# Altium PCB 6C-2L-1550um.PcbDoc
Units mm, origin at the board's own origin, x right, y up, seen from the top; angles counter-clockwise.
Board outline 14 x 14.5 mm, 2 copper layers (Top Layer, Bottom Layer), stack 1.586 mm thick; 18 components, 12 nets, 67 pads, 19 vias.
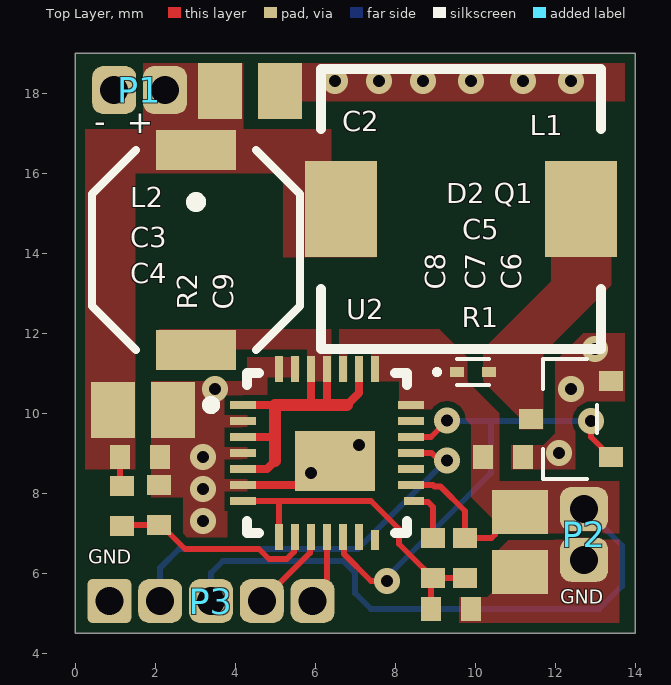
[diagram p0: Top Layer view]
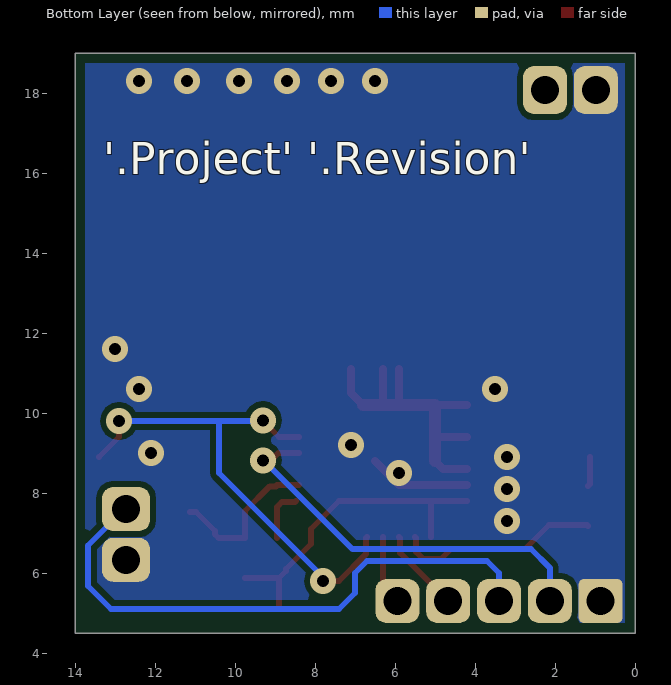
[diagram p1: Bottom Layer view, seen from below]
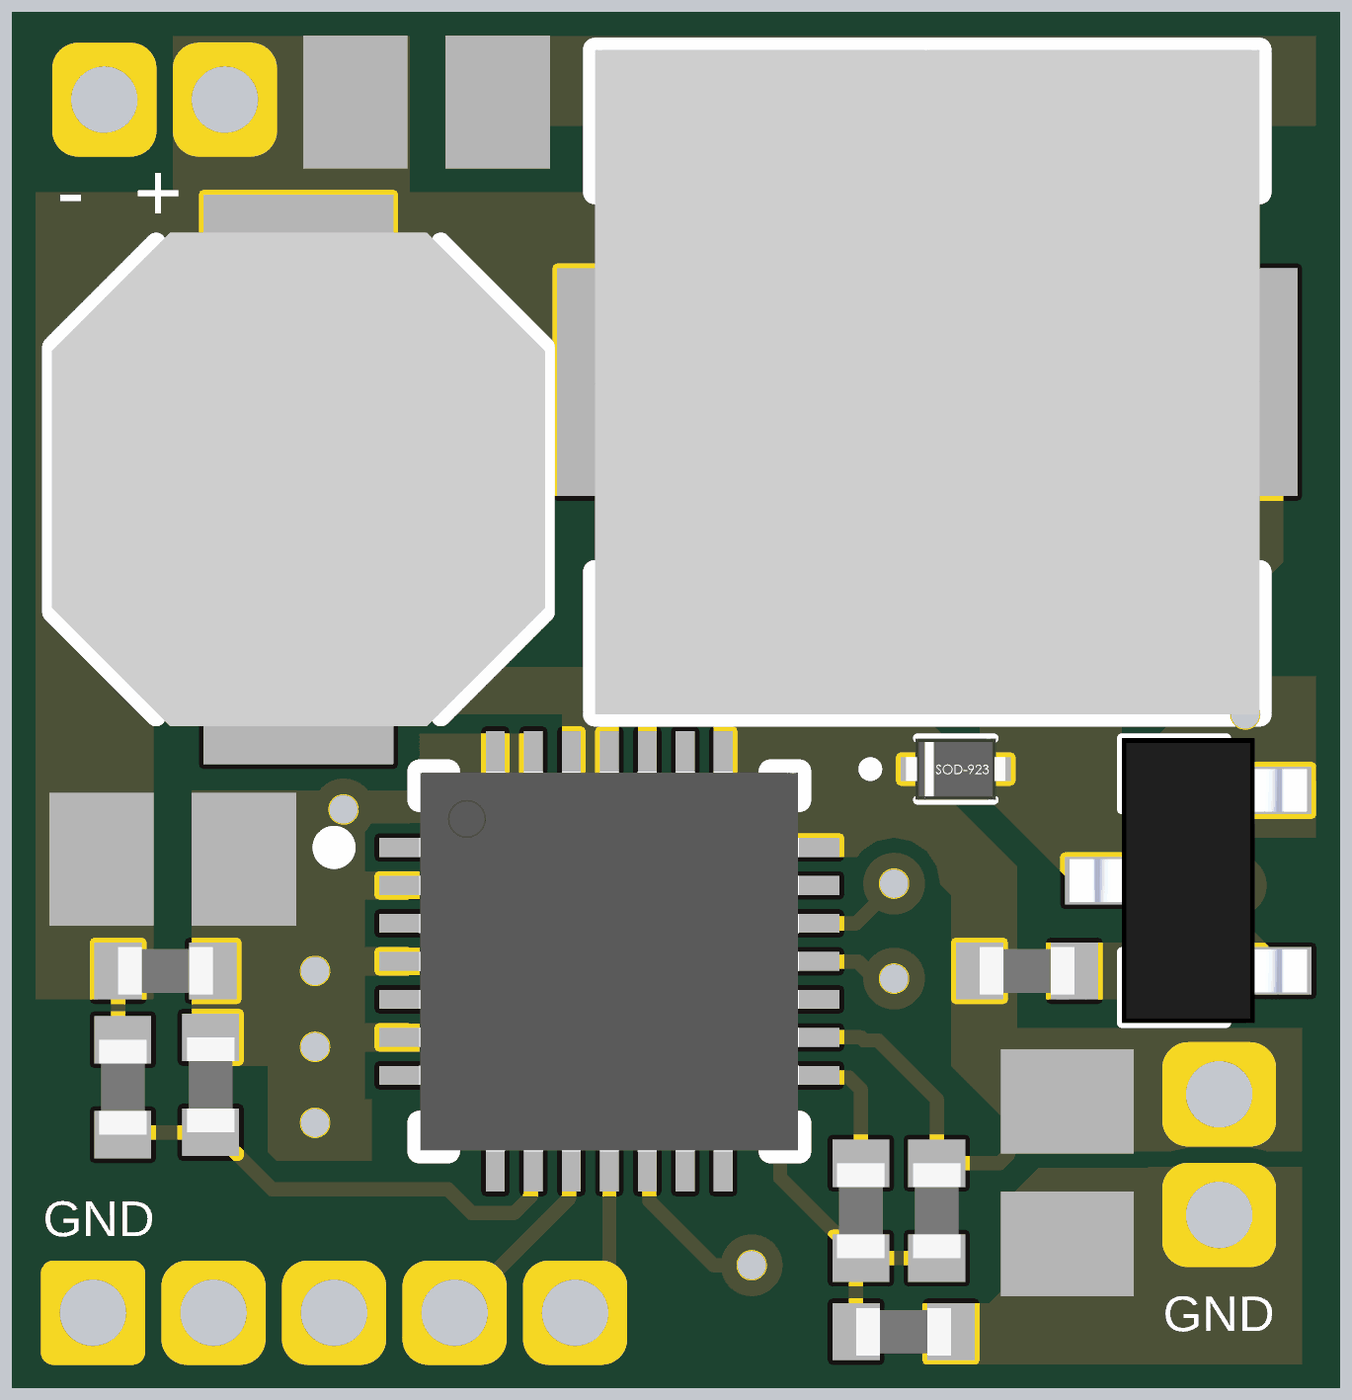
[diagram p2: 3D render of the assembled board from above, using the file's embedded part models]

## Layer stack, top to bottom
Top Solder: solder mask 0.0102, Solder Resist, Dk 3.5
Top Layer: signal copper 0.018
Dielectric1: core 1.55, FR-4, Dk 4.8
Bottom Layer: signal copper 0.018
Bottom Solder: solder mask 0.0102, Solder Resist, Dk 3.5

## Board outline
0,4.5 14,4.5 14,19 0,19

## Design rules (kind name [scope] priority, off if disabled: settings)
BoardOutlineClearance [All] p1: gap=0.25 ignorepadtopadclearanceinfootprint=FALSE except(0: Arc-SplitContinuation Track-SplitContinuation SMDPad-SplitContinuation THPad-SplitContinuation Via-SplitContinuation Fill-SplitContinuation Poly-SplitContinuation Region-SplitContinuation Text-SplitContinuation)
Clearance Clearance-xPP-xTP-xTT [All] p1: gap=0.15 ignorepadtopadclearanceinfootprint=FALSE except(0: Arc-Hole Track-Hole SMDPad-Hole THPad-Hole Via-Hole Fill-Hole Poly-Hole Region-Hole Text-Hole)
ComponentClearance [All] p1: gap=0.25 collisioncheckmode=3 verticalgap=0.25 showdistances=FALSE
DiffPairsRouting [All] p1: maxlimit=0.25 minlimit=0.25 mostfreqgap=0.25 toplayer_minwidth=0.381 toplayer_maxwidth=0.381 toplayer_prefwidth=0.381 bottomlayer_minwidth=0.381 bottomlayer_maxwidth=0.381 bottomlayer_prefwidth=0.381 maxuncoupledlength=12.5
Height [All] p1: minheight=0 maxheight=25 prefheight=12.5
HoleSize HoleSize-PTH [All] p1: absolutevalues=TRUE maxlimit=2 minlimit=0.25 maxpercent=80.000 minpercent=20.000
HoleToHoleClearance [All] p1: gap=0.35 allowstackedmicrovias=TRUE
MinimumAnnularRing "Minimum IAR  >0.45mm" [((ObjectKind = 'Pad') OR (ObjectKind = 'Via')) And (Layer = 'MultiLayer') And (HoleDiameter > AsMM(0.45))] p1: minimumring=0.175 // minimum inner annular ring for pads > 0.45mm finished hole size
MinimumAnnularRing "Minimum IAR <=0.45mm" [((ObjectKind = 'Pad') OR (ObjectKind = 'Via')) And (Layer = 'MultiLayer') And (HoleDiameter <= AsMM(0.45))] p2: minimumring=0.175 // minimum inner annular ring for pads <= 0.45mm finished hole size
MinimumSolderMaskSliver [All] p1: minsoldermaskwidth=0.08
PlaneClearance PlaneClearance-IPI [All] p1: clearance=0.25
PlaneConnect [All] p1: planeconnectstyle=Relief reliefexpansion=0.175 reliefentries=4 reliefconductorwidth=0.2 reliefairgap=0.2
PolygonConnect PolygonConnect-xTW [All] p1: connectstyle=Direct reliefconductorwidth=0.2 reliefentries=4 polygonreliefangle="90 Angle" airgapwidth=0.2
RoutingCorners [All] p1: cornerstyle=45-Degree minsetback=2.5 maxsetback=2.5
RoutingVias "RoutingVias <= 0.45mm" [(ObjectKind = 'Via') And (HoleDiameter <= AsMM(0.45))] p1: holewidth=0.3 width=0.65 viastyle="Through Hole" minholewidth=0.25 minwidth=0.6 maxholewidth=0.45 maxwidth=0.8 // finishet hole size <= 0.45mm
RoutingVias "RoutingVias > 0.45mm" [(ObjectKind = 'Via') And (HoleDiameter > AsMM(0.45))] p2: holewidth=0.5 width=0.85 viastyle="Through Hole" minholewidth=0.5 minwidth=0.85 maxholewidth=0.9 maxwidth=1.25 // finishet hole size > 0.45mm
SilkToSilkClearance [All] p1: silktosilkclearance=0.2
SilkToSolderMaskClearance SilkscreenOverComponentPads [IsPad] p1: minsilkscreentomaskgap=0.2 clearancetoexposedcopper=TRUE
SolderMaskExpansion [All] p1: expansion=0 istentingtop=FALSE
UnRoutedNet [All] p1: checkbadconnections=TRUE
Width Width-xTW [All] p1: maxlimit=1.5 minlimit=0.15 preferedwidth=0.2
18 further rules are at their usual default settings.

## Components (designator, comment, footprint, x,y, rotation, side; value= is the part's Value field where it differs from the comment)
C2 "Cap_0805" 0805 4.375,18.05 r180 top value=22uF
C3 "Cap_0805" 0805 1.7,10.075 r180 top value=22uF
C4 "Cap_0402" 0402 1.625,8.9 r180 top value=100nF
C5 "Cap_0402" 0402 10.7,8.9 r180 top value=100nF
C6 "Cap_0805" 0805 11.125,6.775 r90 top value=22uF
C7 "Cap_0402" 0402 9.75,6.375 r90 top value=100nF
C8 "Cap_0402" 0402 8.95,6.375 r90 top value=470nF
C9 "Cap_0402" 0402 2.1,7.7 r270 top value=100nF
D2 "NSR0140P2" SOD-923 9.55,11.025 r0 top
L1 "SRR7045-102M" SRR7045-102M 6.65,15.1 r0 top value=X
L2 "SD53-4R7-R" SD53-4R7-R 3.025,14.075 r270 top value=X
P1 "1x2 Header" "1x2 Header 1.27" 0.98,18.075 r0 top
P2 "1x2 Header" "1x2 Header 1.27" 12.725,7.6 r270 top
P3 "1x5 Header" "1x5 Header 1.27" 0.86,5.3 r0 top
Q1 "PMV130ENE" SOT-23 13.4,8.9 r90 top
R1 "Res_0402" 0402 9.4,5.1 r0 top value=0
R2 "Res_0402" 0402 1.175,7.675 r270 top value=51K
U2 "Sunboost 3" 28-QFN_0.4mm 4.2,10.2 r0 top

## Footprints (in the part's own frame and the unit in brackets; to place one, negate y for a bottom-side part, rotate by r counter-clockwise, add the part's x,y. Pads: shape width x height; smd on the part's side, far side on the other; paste and mask are expansions set on the pad)
"1x2 Header 1.27" [mm]
  rrect50% 1.1x1.2 hole 0.7 paste+0 mask+0: 1(0,0) 2(1.27,0)
"1x5 Header 1.27" [mm]
  rrect25% 1.1x1.1 hole 0.7 paste+0 mask+0: 1(0,0)
  rrect50% 1.1x1.1 hole 0.7 paste+0 mask+0: 2(1.27,0) 3(2.54,0) 4(3.81,0) 5(5.08,0)
28-QFN_0.4mm [mm]
  rect 0.65x0.2 smd mask+0.05: 1(0,0) 2(0,-0.4) 3(0,-0.8) 4(0,-1.2) 5(0,-1.6) 6(0,-2) 7(0,-2.4) 16(4.2,-2) 17(4.2,-1.6) 18(4.2,-1.2) 19(4.2,-0.8) 20(4.2,-0.4) 21(4.2,0)
  rect 0.2x0.65 smd mask+0.05: 8(0.9,-3.3) 9(1.3,-3.3) 10(1.7,-3.3) 11(2.1,-3.3) 12(2.5,-3.3) 13(2.9,-3.3) 22(3.3,0.9) 23(2.9,0.9) 24(2.5,0.9) 25(2.1,0.9) 26(1.7,0.9) 27(1.3,0.9) 28(0.9,0.9)
  rect 0.2x0.5 smd mask+0.05: 14(3.3,-3.375)
  rect 0.5x0.2 smd mask+0.05: 15(4.275,-2.4)
  rect 2x1.5 smd mask+0.05: 29(2.3,-1.4)
  silkscreen extent -0.9,-3.2 4.1,0.8, body extent 0.1,-3.2 4.1,0.8, height 0.75
0402 [mm]
  rect 0.5x0.6 smd mask+0.05: 1(-0.5,0) 2(0.5,0)
  body extent -0.5,-0.25 0.5,0.25, height 0.25
0805 [mm] "Chip Capacitor, Body 2.0x1.3mm, IPC High Density"
  rect 1.1x1.4 smd: 1(-0.75,0) 2(0.75,0)
  body extent -1.1,-0.72 1.1,0.72, height 1.4
SD53-4R7-R [mm]
  rect 1x2 smd mask+0.05: 1(-2.5,0) 2(2.5,0)
  silkscreen extent -2.5,-2.6 2.5,2.6, body extent -2.6,-2.6 2.6,2.6, height 3
SOD-923 [mm]
  rect 0.36x0.25 smd mask+0.05: 1(0,0) 2(0.8,0)
  silkscreen extent -0.52,-0.33 0.8,0.33, body extent -0.12,-0.32 0.93,0.32, height 0.43
SOT-23 [mm]
  rect 0.5x0.6 smd mask+0.05: 1(0,0) 2(1.9,0) 3(0.95,2)
  silkscreen extent -0.55,0.35 2.45,1.7, body extent -0.55,-0.25 2.45,2.25, height 1.1
SRR7045-102M [mm]
  rect 1.8x2.4 smd mask+0.05: 1(0,0) 2(6,0)
  silkscreen extent -0.5,-3.5 6.5,3.5, body extent -0.5,-3.5 6.5,3.5, height 4.5

## Part data
C2 C3 C4 C5 C6 C7 C8 C9: "Capacitor", LatestRevisionDate=17-Jul-2002, LatestRevisionNote="Re-released for DXP Platform.", PackageDescription="Radial Cap, Thru-Hole; 2 Leads; 0.3 in Pin Spacing", PackageReference=RAD-0.3, Published=8-Jun-2000, Publisher="Altium Limited"
D2: "Typical INFRARED GaAs LED", LatestRevisionDate=08-Jul-2005, LatestRevisionNote="Mech Layer 1 removed.", PackageDescription="LED; 2 Leads", PackageReference=LED-0, Published=8-Jun-2000, Publisher="Altium Limited"
L1 L2: "Inductor"
Q1: "N-Channel MOSFET", LatestRevisionDate=17-Jul-2002, LatestRevisionNote="Re-released for DXP Platform.", PackageDescription="TO, Flat Index; 3 In-Line, Axial Leads; Body Dia. 4.6mm; Lead Dia. 0.5 mm (max)", PackageReference=E3, PackageVersion=1995/1996, Published=8-Jun-2000, Publisher="Altium Limited"
R1 R2: "Resistor", LatestRevisionDate=17-Jul-2002, LatestRevisionNote="Re-released for DXP Platform.", PackageDescription="Axial Device, Thru-Hole; 2 Leads; 0.4 in Pin Spacing", PackageReference=AXIAL-0.4, Published=8-Jun-2000, Publisher="Altium Limited"
U2: "Initvation Sunboost 3"

## Via types
v1: diameter 0.65, hole 0.3, Top Layer to Bottom Layer, tented both sides, 19 vias

## Nets (pads, with @x,y where several pads share a name; then routed paths per layer and width w, separated by ;. In a path a pad name is that pad's centre, name@x,y a point inside that pad or via, vN(x,y) a via of type N, cw(c..) or ccw(c..) an arc to the next point about the centre after c; other vN are vias at no path point)
DGND: C7.1 C8.1 R1.1 U2.7 U2.8 | length 8.3
  Top Layer w0.15: U2.7 5.1,7.8 ; U2.8 5.1,7.8 ; R1.1 C8.1@8.9,5.875 ; C7.1 C8.1 C8.1@8.9,5.875 ; 5.1,7.8 7.4,7.8 8.1,7.1 8.1,6.725 8.725,6.1 8.725,6.05 C8.1@8.9,5.875
GND: C2.1 C3.1 C4.1 C5.1 C6.1 C9.1 P1.1 P2.2 P3.1 Q1.2 R1.2 U2.2 U2.4 U2.6 U2.27 U2.28 U2.29 | length 2.5
  Top Layer w0.2: U2.6 5.9,8.2 U2.29
  other v1: 3.2,7.3 3.2,8.1 5.9,8.5 3.2,8.9 12.1,9 7.1,9.2 3.5,10.6 12.4,10.6 13,11.6 6.5,18.3 7.6,18.3 8.7,18.3 9.9,18.3 11.2,18.3 12.4,18.3
ICSP: P3.2 U2.18 | length 10.1
  Top Layer w0.15: U2.18 8.917,9 9.098,8.818 v1(9.3,8.818) 9.294,8.818 9.288,8.812 v1@9.3,8.8
  Bottom Layer w0.15: P3.2 2.13,6.13 2.6,6.6 7.069,6.6 9.288,8.818 v1(9.3,8.818)
ICSPCLK: P3.4 U2.10 | length 2.1
  Top Layer w0.15: P3.4 5.875,6.505 5.875,6.875 U2.10
ICSPDAT: P3.5 U2.11 | length 1.7
  Top Layer w0.15: P3.5 6.3,5.66 U2.11
NetC8_2: C8.2 U2.15 | length 1.3
  Top Layer w0.15: U2.15 8.497,7.778 8.822,7.778 8.9,7.7 8.95,7.65 C8.2
NetC9_2: C9.2 R2.2 U2.9 | length 5.1
  Top Layer w0.15: R2.2 1.2,7.2 C9.2 2.15,7.2 2.75,6.6 4.6,6.6 4.85,6.35 5.296,6.35 5.475,6.529 5.475,6.875 U2.9
NetD2_2: D2.2 L1.2 Q1.3
NetL2_2: L2.2 U2.1 U2.3 U2.5 U2.23 U2.25 U2.26 | length 8.5
  Top Layer w0.2: U2.5 4.8,8.6 5,8.8 ; U2.3 4.9,9.4 5,9.5 ; U2.1 5,10.2 ; 5.9,10.2 U2.26 ; 6.3,10.2 U2.25 ; 6.8,10.2 7.1,10.5 U2.23
  Top Layer w0.3: 5,8.8 5,9.5 5,10.2 5.9,10.2 6.3,10.2 6.8,10.2
PWM: Q1.1 U2.12 U2.19 | length 12.7
  Top Layer w0.15: U2.12 6.722,6.878 6.722,6.478 7.4,5.8 v1(7.8,5.8) ; U2.19 8.9,9.4 9.3,9.8 v1(9.3,9.818) ; v1(12.9,9.8) 12.9,9.4 Q1.1
  Bottom Layer w0.15: v1(7.8,5.8) 7.8,5.9 10.4,8.5 10.4,9.8 ; v1(9.3,9.818) 9.319,9.8 10.4,9.8 ; v1(12.9,9.8) 10.4,9.8
Solar+: C2.2 C3.2 C4.2 L1.1 L2.1 P1.2 R2.1 | length 0.7
  Top Layer w0.15: C4.2 1.125,8.225 R2.1
VCC: C5.2 C6.2 C7.2 D2.1 P2.1 P3.3 U2.16 U2.21 U2.22 U2.24 | length 18.5
  Top Layer w0.15: U2.16 8.95,8.2 8.982,8.168 9.132,8.168 9.75,7.55 C7.2 10.412,6.875 10.5,6.963 10.5,7.05 10.975,7.525 C6.2
  Bottom Layer w0.15: P3.3 3.4,6 3.7,6.3 6.7,6.3 7,6 7,5.5 7.4,5.1 13.1,5.1 13.675,5.675 13.675,6.687 12.762,7.6 P2.1
pads on no net: U2.13 U2.14 U2.17 U2.20

## Polygon pours and split planes (outlines as drawn)
GND on Top Layer "NONET_L-01_P-001" (solid, pour order 8): 4.6,19.2 14,19.2 14,17.8 4.6,17.8
Solar+ on Top Layer "NONET_L-01_P-001" (solid, pour order 0): 1.7,19 1.7,17.1 0,17.1 0,8.6 1.5,8.6 1.5,16 5.2,16 5.2,13.9 7.5,13.9 7.5,16.3 6.4,16.3 6.4,17.1 4.2,17.1 4.2,19
GND on Top Layer "NONET_L-01_P-001" (solid, pour order 2): 5.6,11.4 4.3,11.4 4.3,10.8 1.9,10.8 1.9,7.9 2.7,7.9 2.7,6.9 3.8,6.9 3.8,8 4.3,8 4.3,10.4 4.8,10.4 4.8,10.9 5.6,10.9
GND on Top Layer "NONET_L-01_P-001" (solid, pour order 7): 10.9,9.2 11.7,9.2 12,9.5 12,11.3 12.7,12 14.2,12 14.2,10.3 12.8,10.3 12.5,10 12.5,8.6 10.9,8.6
GND on Top Layer "NONET_L-01_P-001" (solid, pour order 6): 9.6,5.4 10.3,5.4 10.5,5.6 10.5,6.5 11,7 13.6,7 13.6,4.3 13.7,4.2 13.4,3.9 10.2,3.9 9.6,4.5
VCC on Top Layer "NONET_L-01_P-001" (solid, pour order 5): 6.6,10.8 6.8,10.8 6.8,11.7 7.4,11.7 7.4,10.8 8.1,10.8 8.1,10.1 9.5,10.1 9.9,9.7 9.9,7.9 10.8,7 13.6,7 13.6,8.3 10.6,8.3 10.6,10 9.8,10.8 9.8,11.4 9.1,12.1 6.6,12.1
NetD2_2 on Top Layer "NONET_L-01_P-001" (solid, pour order 4): 11.9,15.9 11.9,13.3 10.2,11.6 10.2,10.8 11.1,9.9 11.1,9.6 11.7,9.6 11.7,11.5 13.4,13.2 13.4,15.9
NetL2_2 on Top Layer "NONET_L-01_P-001" (solid, pour order 3): 2.1,11.4 4,11.4 4,11.6 5.8,11.6 5.8,10.8 6.4,10.8 6.4,12.1 2.1,12.1
GND on Bottom Layer "NONET_L-01_P-001" (solid, remove dead copper, pour order 9): 0,19 14,19 14,4 0,4

## Silkscreen, mask and mechanical layers (free items; w line width, h text height)
Top Overlay:
  text "-" at 0.478,16.808 h1
  text "+" at 1.289,16.796 h1
  text "GND" at 0.334,6.107 h0.6
  text "GND" at 12.134,5.107 h0.6
Bottom Overlay:
  text "'.Project' '.Revision'" at 13.3,15.967 h0.8
Dimensions:
  the board outline again, w0.1